# Altium PCB RBR-RAMON.PcbDoc
Units mil, origin at the board's own origin, x right, y up, seen from the top; angles counter-clockwise.
Board outline 21263 x 11773 mil, 2 copper layers (Top Layer, Bottom Layer); 13 components, 37 nets, 161 pads, 20 vias.
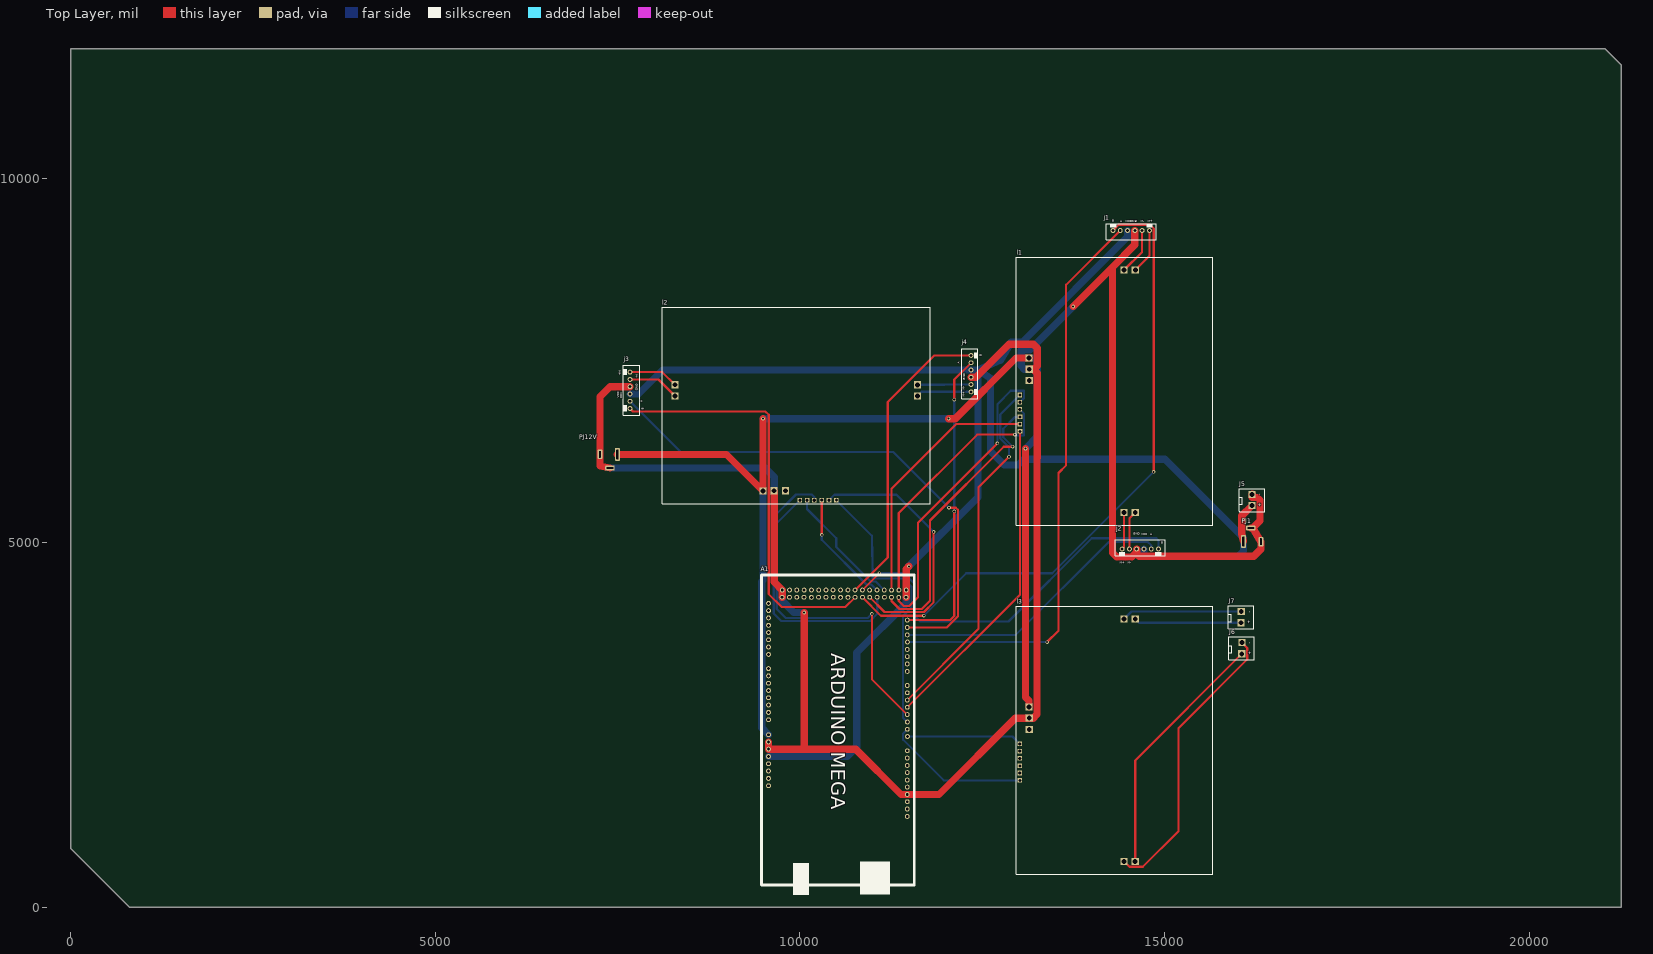
[diagram p0: Top Layer view]
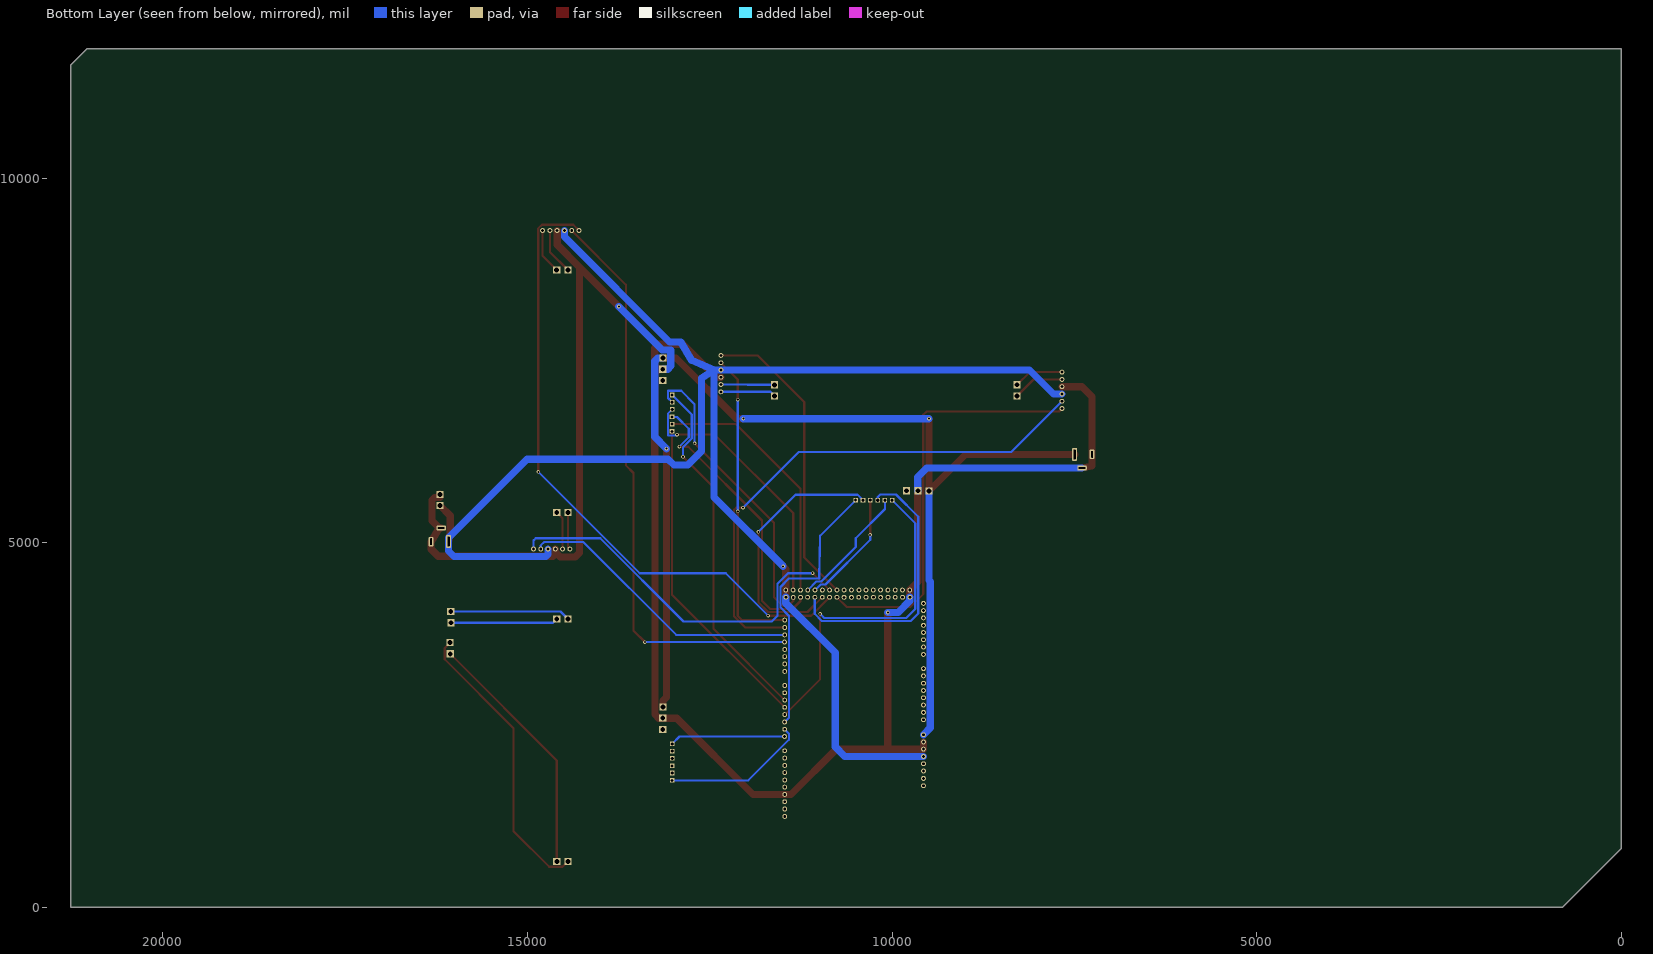
[diagram p1: Bottom Layer view, seen from below]
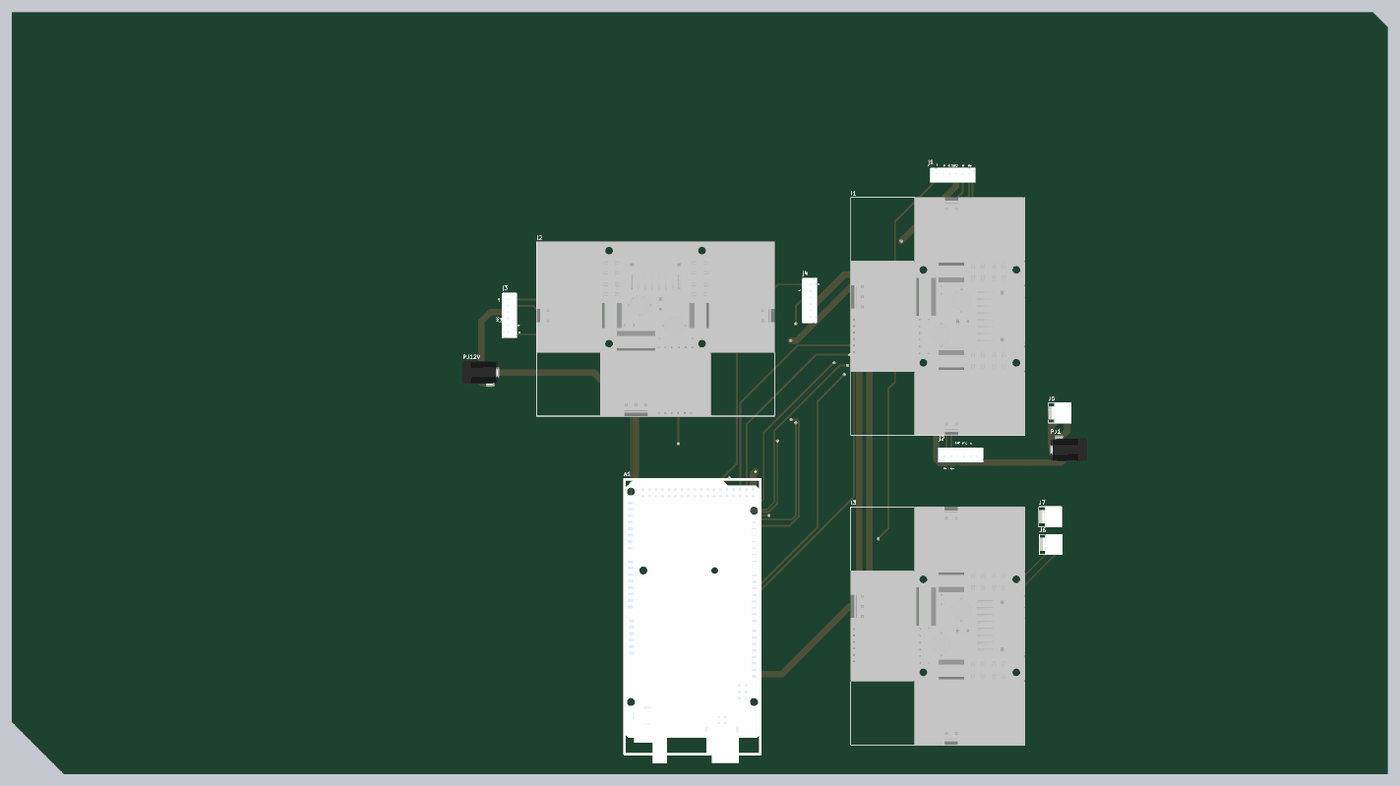
[diagram p2: 3D render of the assembled board from above, using the file's embedded part models]

## Layer stack, top to bottom
Top Solder: solder mask 0.4, Solder Resist, Dk 3.5
Top Layer: signal copper 1.4
Dielectric 1: dielectric 12.6, FR-4, Dk 4.8
Bottom Layer: signal copper 1.4
Bottom Solder: solder mask 0.4, Solder Resist, Dk 3.5

## Board outline
21038,11773 21263,11548 21263,0 805,0 0,805 0,11773

## Design rules (kind name [scope] priority, off if disabled: settings)
Clearance [All] p1: gap=10 ignorepadtopadclearanceinfootprint=FALSE
Height [All] p1: minheight=0 maxheight=3000 prefheight=500
PolygonConnect [All] p1: connectstyle=Relief reliefconductorwidth=10 reliefentries=4 polygonreliefangle="90 Angle" airgapwidth=10
RoutingVias [All] p1: holewidth=28 width=50 viastyle="Through Hole" minholewidth=28 minwidth=50 maxholewidth=28 maxwidth=50
SolderMaskExpansion [All] p1: expansion=0 istentingtop=FALSE
SupplyNets "Schematic Supply Nets_2" [InNet('+12')] p1: voltage=0.000
SupplyNets "Schematic Supply Nets_1" [InNet('GND')] p2: voltage=0.000
SupplyNets "Schematic Supply Nets" [InNet('+5')] p3: voltage=0.000
Width "POWER GND" [InNet('GND')] p1: maxlimit=120 minlimit=60 preferedwidth=100
Width "POWER 12V" [InNet('+12')] p2: maxlimit=100 minlimit=60 preferedwidth=100
Width "POWER 5V" [InNet('+5')] p3: maxlimit=100 minlimit=60 preferedwidth=100 // sirve para 12V, GND y 5V
Width Señal [All] p4: maxlimit=30 minlimit=30 preferedwidth=30
29 further rules are at their usual default settings.

## Components (designator, comment, footprint, x,y, rotation, side; value= is the part's Value field where it differs from the comment)
A1 "Arduino Mega" "Arduino Mega" 9472,4333 r270 top
j1 "j1" "CONECTOR JST M1" 14581,9186 r180 top
j2 "j2" "CONECTOR JST M2" 14629,5006 r0 top
j3 "j3" "CONECTOR JST M3" 7764.02,7127 r270 top
j4 "j4" "CONECTOR JST M4" 12252.98,7279 r90 top
J5 "Connector_5V" Conector_5V 16159.66,5600.98 r90 top
J6 "Connector_12V" Conector_12V 16019.63,3567.52 r90 top
J7 "Connector_12V" Conector_12V 16010,3994 r90 top
l1 "l298n" L298N_Conectores 13969,7238 r270 top
l2 "l298n" L298N_Conectores 9786,6535 r0 top
l3 "l298n" L298N_Conectores 13968,2453 r270 top
PJ1 "DC Power Jack 5V" "DC Power Jack5V" 16348,5196 r180 top
PJ12V "DC Power Jack 12V" "DC Power Jack12V" 7230,6028 r0 top

## Footprints (in the part's own frame and the unit in brackets; to place one, negate y for a bottom-side part, rotate by r counter-clockwise, add the part's x,y. Pads: shape width x height; smd on the part's side, far side on the other; paste and mask are expansions set on the pad)
"Arduino Mega" [mm]
  round 1.7 hole 1: 0-TX0(32.817,50.8) 1-TX0(35.357,50.8) 2(37.925,50.8) 3(40.411,50.8) 3.3V(60.096,2.464) 4(42.977,50.8) 5(45.542,50.825) 5V(-0.406,50.419) 5V(2.083,50.394) 5V(57.556,2.464) 6(48.082,50.8) 7(50.597,50.851) 8(55.55,50.8) 9(58.09,50.8) 10(60.655,50.8) 11(63.17,50.8) 12(65.761,50.8) 13(68.224,50.8) 14-TX3(27.889,50.8) 15-RX3(25.324,50.8) 16-TX2(22.784,50.8) 17-RX2(20.244,50.8) 18-TX1(17.704,50.851) 19-RX1(15.19,50.8) 20-SDA(12.624,50.8) 21-SCL(10.058,50.8) 22(2.108,47.828) 23(-0.406,47.854) 24(2.083,45.288) 25(-0.381,45.314) 26(2.083,42.799) 27(-0.406,42.774) 28(2.083,40.31) 29(-0.406,40.259) 30(2.083,37.719) 31(-0.406,37.694) 32(2.083,35.179) 33(-0.406,35.154) 34(2.083,32.639) 35(-0.406,32.614) 36(2.108,30.124) 37(-0.406,30.099) 38(2.108,27.559) 39(-0.406,27.559) 40(2.083,25.019) 41(-0.406,24.938) 42(2.083,22.454) 43(-0.406,22.479) 44(2.083,19.914) 45(-0.406,19.939) 46(2.108,17.374) 47(-0.432,17.399) 48(2.083,14.808) 49(-0.406,14.884) 50(2.083,12.319) 51(-0.432,12.319) 52(2.083,9.754) 53(-0.432,9.804) A0(44.755,2.489) A1(42.189,2.464) A2(39.624,2.489) A3(37.109,2.464) A4(34.569,2.489) A5(32.055,2.464) A6(29.464,2.489) A7(26.949,2.464) A8(21.996,2.489) A9(19.431,2.464) A10(16.891,2.489) A11(14.376,2.489) A12(11.862,2.489) A13(9.271,2.489) A14(6.756,2.489) A15(4.216,2.489) AREF(73.304,50.8) GND(-0.406,7.264) GND(2.083,7.214) GND(52.476,2.438) GND(54.991,2.489) GND(70.764,50.8) IOREF(65.176,2.464) N/A(67.742,2.489) RESET(62.611,2.438) SCL(78.435,50.8) SDA(75.844,50.8) VIN(49.987,2.489)
  silkscreen extent -5.66,-0.03 105.84,53.24, body extent -5.72,-0.1 102.24,53.31, height 10.71
"CONECTOR JST M1" [mm]
  round 1.7 hole 1: A1(4.775,-2.388) B1(7.315,-2.388) GND1(-0.305,-2.388) M1+(-5.359,-2.388) M1-(-2.819,-2.388) VCC1(2.235,-2.388)
  silkscreen extent -7.77,-4.7 9.73,0.91, body extent -7.82,-4.73 9.72,1.02, height 2.95
"CONECTOR JST M2" [mm]
  round 1.7 hole 1: A2(4.775,-2.388) B2(7.315,-2.388) GND2(-0.305,-2.388) M2+(-5.359,-2.388) M2-(-2.819,-2.388) VCC2(2.235,-2.388)
  silkscreen extent -7.77,-4.7 9.73,0.91, body extent -7.82,-4.73 9.72,1.02, height 2.95
"CONECTOR JST M3" [mm]
  round 1.7 hole 1: A3(4.775,-2.388) B3(7.315,-2.388) GND3(-0.305,-2.388) M3+(-5.359,-2.388) M3-(-2.819,-2.388) VCC3(2.235,-2.388)
  silkscreen extent -7.77,-4.7 9.73,0.91, body extent -7.82,-4.73 9.72,1.02, height 2.95
"CONECTOR JST M4" [mm]
  round 1.7 hole 1: A4(4.775,-2.388) B4(7.315,-2.388) GND4(-0.305,-2.388) M4+(-5.359,-2.388) M4-(-2.819,-2.388) VCC4(2.235,-2.388)
  silkscreen extent -7.77,-4.7 9.73,0.91, body extent -7.82,-4.73 9.72,1.02, height 2.95
Conector_5V [mm]
  rect 2.5x2.5 hole 1.7: 5V(-2.35,-1) GND(1.55,-1.05)
  silkscreen extent -4.42,-5.42 3.53,3.5, body extent -4.42,-5.48 3.58,3.5, height 11.7
Conector_12V [mm]
  rect 2.5x2.5 hole 1.7: 12V(-2.35,-1) GND(1.55,-1.05)
  silkscreen extent -4.42,-5.42 3.53,3.5, body extent -4.42,-5.48 3.58,3.5, height 11.7
"DC Power Jack5V" [mm]
  rrect50% 1.8x3.3 hole 0.6 slot 2.3 at 90 deg: GND(0.686,4.648)
  rrect50% 3.3x1.8 hole 0.6 slot 2.3 at 0 deg: GND(4.191,-0.127)
  rrect50% 1.8x4.5 hole 0.7 slot 3.4 at 90 deg: VCC(6.756,4.597)
  body extent -6.79,-0.33 7.41,9.12, height 11
"DC Power Jack12V" [mm]
  rrect50% 1.8x3.3 hole 0.6 slot 2.3 at 90 deg: GND(0.686,4.648)
  rrect50% 3.3x1.8 hole 0.6 slot 2.3 at 0 deg: GND(4.191,-0.127)
  rrect50% 1.8x4.5 hole 0.7 slot 3.4 at 90 deg: VCC(6.756,4.597)
  body extent -6.79,-0.33 7.41,9.12, height 11
L298N_Conectores [mm]
  rect 2.5x2.5 hole 1.7: 5V(0.356,-20.93) 12V(-7.442,-20.98) GND(-3.556,-20.93) OUT1(-38.1,16.002) OUT2(-38.1,12.09) OUT3(46.33,12.065) OUT4(46.33,15.977)
  rect 1.6x1.6 hole 1.1: ENA(5.41,-24.206) ENB(18.11,-24.181) IN1(7.925,-24.206) IN2(10.439,-24.232) IN3(13.056,-24.181) IN4(15.545,-24.206)
  silkscreen extent -42.6,-25.45 50.87,42.92, body extent -42.63,-25.48 50.87,43.02, height 26.7

## Part data
j1: library part "CONECTOR JST M1"
j2: library part "CONECTOR JST M2"
j3: library part "CONECTOR JST M3"
j4: library part "CONECTOR JST M4"

## Via types
v1: diameter 50, hole 28, Top Layer to Bottom Layer, 20 vias

## Nets (pads, with @x,y where several pads share a name; then routed paths per layer and width w, separated by ;. In a path a pad name is that pad's centre, name@x,y a point inside that pad or via, vN(x,y) a via of type N, cw(c..) or ccw(c..) an arc to the next point about the centre after c; other vN are vias at no path point)
+5: A1.5V j1.VCC1 j2.VCC2 j3.VCC3 j4.VCC4 J5.5V PJ1.VCC | length 22385.9
  Top Layer w100: A1.5V@11456,4251 11456,4299 11457,4300 11457,4349 11457,4637.29 v1(11494,4674.29) ; PJ1.VCC 16058,5120 16058,5367.42 J5.5V
  Bottom Layer w100: j3.VCC3 7787,7039 8115,7367 j4.VCC4 12441,7367 ; A1.5V@9569,2067 10647,2067 10780,2200 10780,3493 11456,4169 A1.5V@11456,4251 ; v1(11494,4674.29) 12441,5621.29 12441,7367 ; j1.VCC1 14493,9193 13052.35,7752.35 12898.35,7752.35 12746,7500 12441,7367 ; j2.VCC2 14717,4842 14750,4809 16006,4809 16082,4885 16082,5068 15005,6145 13071.51,6145 12990.92,6064.41 12800,6064.41 12613,6251.41 12613,7254 12441,7367
+12: A1.VIN l1.12V l2.12V l3.12V PJ12V.VCC | length 15539.1
  Top Layer w100: PJ12V.VCC 8993,6209 l2.12V v1(9493,6700) ; v1(12040,6700) 12131,6700 12962,7531 l1.12V ; v1(13092,6288) 13092,2881 13142,2831 l3.12V
  Bottom Layer w100: l2.12V 9493,4479.88 9475.54,4462.41 9475.54,2459.46 A1.VIN ; v1(9493,6700) v1(12040,6700) ; v1(13092,6288) 13255,6451 13255,7487 13211,7531 l1.12V
GND: A1.GND j1.GND1 j2.GND2 j3.GND3 j4.GND4 J5.GND l1.GND l2.GND l3.GND PJ1.GND PJ12V.GND | length 28352.7
  Top Layer w100: PJ12V.GND@7395,6023 7257,6050 7257,6211 7257,7000 7396,7139 j3.GND3 ; A1.GND@9568,2267 9568,2218 9570,2216 9570,2168 10057,2168 ; l2.GND 9646,4461 9758,4349 9758,4301 9756,4299 A1.GND@9756,4251 ; v1(10057,4041) 10057,2168 ; j4.GND4 12413,7267 12868,7722 13200,7722 13253,7669 13253,7422 13209,7378 13200,7378 ; l1.GND 13200,7378 ; v1(13747,8238) 14287,8778 ; j1.GND1 14593,9084 14287,8778 ; j2.GND2 14617,4871 ; PJ1.GND@16183,5201 PJ1.GND@16210,5201 ; J5.GND 16201,5619 16275,5619 16310,5584 16310,5301 PJ1.GND@16210,5201 ; 10057,2168 10764,2168 11385,1547 11472,1547 11907,1547 12953,2593 l3.GND 13200,2593 13252,2645 13252,6157 13255,6160 13255,7323 13200,7378 ; 14287,8778 14287,4862.58 14345.58,4804 14550,4804 14617,4871 ; 14617,4871 14617,4846 14650,4813 16223,4813 16321,4911 16321,5013 PJ1.GND@16210,5201
  Bottom Layer w100: PJ12V.GND@7395,6023 9523,6023 9646,5900 l2.GND ; A1.GND@9756,4251 9756,4201.53 9916.53,4041 v1(10057,4041) ; l1.GND 13077,7378 13033,7422 13033,7641 13150,7641 v1(13747,8238)
NetA1_2: A1.2 l1.ENA | length 4922.8
  Top Layer w30: A1.2 12449,3816.9 12449,5760 v1(12866.54,6177.54)
  Bottom Layer w30: v1(12866.54,6177.54) 12866.54,6308.74 12748,6427.27 12748,6757 l1.ENA
NetA1_3: A1.3 l1.ENB | length 4423
  Top Layer w30: A1.3 13017,4287 l1.ENB
NetA1_4: A1.4 l2.ENA | length 4589
  Top Layer w30: v1(10986,4024) 10986,3127 A1.4
  Bottom Layer w30: l2.ENA 9681,5264 9681,4089.06 9804.06,3966 10928,3966 v1(10986,4024)
NetA1_5: A1.5 l2.ENB | length 3783.9
  Bottom Layer w30: l2.ENB 10986.66,5095.34 10998,4507 11415,4507 11531,4391 11531,4113 11413,3995 11413,2600 A1.5
NetA1_6: A1.6 l3.ENB | length 1997.7
  Bottom Layer w30: A1.6 11415,2383 11415,2298 11973,1740 l3.ENB
NetA1_7: A1.7 l3.ENA | length 1582.8
  Bottom Layer w30: A1.7 12914,2341 l3.ENA
NetA1_18-TX1: A1.18-TX1 j1.A1 | length 7974.9
  Top Layer w30: v1(13389,3636) 13545,3792 13545,5954 13650,6059 13650,8537.02 j1.A1
  Bottom Layer w30: A1.18-TX1 v1(13389,3636)
NetA1_19-RX1: A1.19-RX1 j2.A2 | length 3942.2
  Bottom Layer w30: A1.19-RX1 12959.97,3734.97 14234,5009 14769.98,5009 14817,4961.98 j2.A2
NetA1_20-SDA: A1.20-SDA j3.A3 | length 7333.1
  Top Layer w30: A1.20-SDA 12014,3836 12167,3989 12167,5450 12138,5479 v1(12044,5479)
  Bottom Layer w30: j3.A3 8368,6241 11282,6241 v1(12044,5479)
NetA1_21-SCL: A1.21-SCL j4.A4 | length 4235.7
  Top Layer w30: A1.21-SCL 12058,3937 12116,3995 v1(12116,5429) ; v1(12116,6961) 12116,7236 j4.A4
  Bottom Layer w30: v1(12116,5429) v1(12116,6961)
NetA1_22: A1.22 l1.IN1 | length 4112.4
  Top Layer w30: A1.22 11355,4200 11424,4131 11500,4131 11620,4251 11620,5273 v1(12708,6361)
  Bottom Layer w30: v1(12708,6361) 12708,6899 12891,7082 13073,7082 13073,6983 l1.IN1
NetA1_23: A1.23 l1.IN2 | length 3609.1
  Top Layer w30: A1.23 11356,5406 12431,6481 v1(12950,6481)
  Bottom Layer w30: v1(12950,6481) 12963,6468 13074,6468 13074,6768 l1.IN2
NetA1_24: A1.24 l1.IN3 | length 3920
  Top Layer w30: A1.24 11255,4200 11364,4091 11670.52,4091 11782.45,4202.93 11782.45,5303.45 12795,6316 v1(12917,6316)
  Bottom Layer w30: v1(12917,6316) 12788,6445 12788,6562 12950,6724 l1.IN3
NetA1_25: A1.25 l1.IN4 | length 3517.8
  Top Layer w30: A1.25 11256,5738 12144,6626 l1.IN4
NetA1_27: A1.27 l2.IN1 | length 1710.9
  Bottom Layer w30: l2.IN1 10098,5462 10498,5062 10498,4939.34 10970.34,4467 11038,4467 A1.27
NetA1_28: A1.28 l2.IN2 | length 3794.8
  Bottom Layer w30: l2.IN2 10197,5625 10163,5659 9945,5659 9641,5355 9641,4029 9744,3926 10962,3926 11059,4023 A1.28
NetA1_29: A1.29 l2.IN3 | length 1586.4
  Top Layer w30: v1(10300,5106) l2.IN3
  Bottom Layer w30: v1(10300,5106) 10300,5039.61 10912.61,4427 10979,4427 A1.29
NetA1_30: A1.30 l2.IN4 | length 3656.2
  Top Layer w30: A1.30 11159,4049 11700,4049 11833,4182 v1(11833,5147)
  Bottom Layer w30: l2.IN4 10472,5656 11324,5656 v1(11833,5147)
NetA1_32: A1.32 j1.B1 | length 8866.3
  Top Layer w30: A1.32 11109.99,3998 v1(11698.24,3998) ; j1.B1 14373,9360 14800,9360 14851,9309 v1(14851,5971)
  Bottom Layer w30: v1(11698.24,3998) 12280.68,4580.44 13460.44,4580.44 v1(14851,5971)
NetA1_33: A1.33 j2.B2 | length 5291.5
  Top Layer w30: A1.33 v1(11088,4581)
  Bottom Layer w30: v1(11088,4581) 11427,4581 11571,4437 11571,3998 11650,3919 12859,3919 14000,5060 14887,5060 14917,5030 j2.B2
NetA1_34: A1.34 j3.B3 | length 5711.2
  Top Layer w30: j3.B3 7710.02,6799 9525,6799 9571,6753 9571,4294 9748.91,4116.09 10622.1,4116.09 A1.34
NetA1_35: A1.35 j4.B4 | length 4172.8
  Top Layer w30: A1.35 11204,4797 11204,6929 11842,7567 j4.B4
Netj1_M1+: j1.M1+ l1.OUT1 | length 621.9
  Top Layer w30: l1.OUT1 14792,8931 j1.M1+
Netj1_M1-: j1.M1- l1.OUT2 | length 644.3
  Top Layer w30: l1.OUT2 14692,8985 j1.M1-
Netj2_M2+: j2.M2+ l1.OUT3 | length 512.8
  Top Layer w30: j2.M2+ 14444,4938 l1.OUT3
Netj2_M2-: j2.M2- l1.OUT4 | length 535.2
  Top Layer w30: j2.M2- 14518,5334 l1.OUT4
Netj3_M3+: j3.M3+ l2.OUT1 | length 687.6
  Top Layer w30: j3.M3+ 8113,7338 l2.OUT1
Netj3_M3-: j3.M3- l2.OUT2 | length 710
  Top Layer w30: j3.M3- 8059,7238 l2.OUT2
Netj4_M4+: j4.M4+ l2.OUT3 | length 761
  Bottom Layer w30: l2.OUT3 11668,7068 j4.M4+
Netj4_M4-: j4.M4- l2.OUT4 | length 738.7
  Bottom Layer w30: l2.OUT4 11979,7164 11983,7168 j4.M4-
NetJ6_12V: J6.12V l3.OUT4 | length 3451.6
  Top Layer w30: l3.OUT4 14597,2013 J6.12V
NetJ6_GND: J6.GND l3.OUT3 | length 3986.8
  Top Layer w30: l3.OUT3 14518,554 14700,554 15190,1044 15190,2455 16134,3399 16134,3555.51 J6.GND
NetJ7_12V: J7.12V l3.OUT1 | length 1472.7
  Bottom Layer w30: l3.OUT1 14649.52,3901.48 J7.12V
NetJ7_GND: J7.GND l3.OUT2 | length 1649.6
  Bottom Layer w30: l3.OUT2 14546.02,4055.02 J7.GND
pads on no net: A1.0-TX0 A1.1-TX0 A1.3.3V A1.8 A1.9 A1.10 A1.11 A1.12 A1.13 A1.14-TX3 A1.15-RX3 A1.16-TX2 A1.17-RX2 A1.26 A1.31 A1.36 A1.37 A1.38 A1.39 A1.40 A1.41 A1.42 A1.43 A1.44 A1.45 A1.46 A1.47 A1.48 A1.49 A1.50 A1.51 A1.52 A1.53 A1.A0 A1.A1 A1.A2 A1.A3 A1.A4 A1.A5 A1.A6 A1.A7 A1.A8 A1.A9 A1.A10 A1.A11 A1.A12 A1.A13 A1.A14 A1.A15 A1.AREF A1.IOREF A1.N/A A1.RESET A1.SCL A1.SDA l1.5V l2.5V l3.5V l3.IN1 l3.IN2 l3.IN3 l3.IN4

## Text inside footprints (layer, text, board x,y; h text height)
A1: Top Overlay "ARDUINO MEGA" at 10430,3483 h196.85 r270
j1: Top Overlay "M+" at 14767,9391 h27.56; Top Overlay "M-" at 14676,9392 h27.56; Top Overlay "GND" at 14627,9419 h27.56 r180; Top Overlay "VCC" at 14460,9391 h27.56; Top Overlay "A" at 14394,9394 h27.56; Top Overlay "B" at 14280,9399 h27.56
j2: Top Overlay "M+" at 14386,4711 h27.56; Top Overlay "M-" at 14492,4707 h27.56; Top Overlay "GND" at 14572,5105 h27.56; Top Overlay "VCC" at 14682,5098 h27.56; Top Overlay "A" at 14802,5099 h27.56; Top Overlay "B" at 14952,4986 h27.56
j3: Top Overlay "M+" at 7518,7367 h27.56 r270; Top Overlay "M-" at 7745,7309 h27.56 r270; Top Overlay "GND" at 7745,7180 h27.56 r270; Top Overlay "VCC" at 7539,7060 h27.56 r270; Top Overlay "A" at 7820,6951 h27.56 r270; Top Overlay "B" at 7829,6849 h27.56 r270
j4: Top Overlay "B" at 12491,7556 h27.56 r90; Top Overlay "A" at 12188,7455 h27.56 r90; Top Overlay "VCC" at 7521,6988 h27.56 r90; Top Overlay "GND" at 12266,7224 h27.56 r90; Top Overlay "M-" at 12260,7097 h27.56 r90; Top Overlay "M+" at 12260,7000 h27.56 r90
J5: Top Overlay "-" at 16328.79,5647.39 h39.37 r90; Top Overlay "+" at 16326.5,5494.83 h39.37 r90
J6: Top Overlay "-" at 16188.76,3613.94 h39.37 r90; Top Overlay "+" at 16186.47,3461.38 h39.37 r90
J7: Top Overlay "-" at 16179.13,4040.42 h39.37 r90; Top Overlay "+" at 16176.84,3887.86 h39.37 r90